# Altium PCB PCB3.PcbDoc (part 3 of 4)
Units mm, origin at the board's own origin, x right, y up, seen from the top; angles counter-clockwise.
Board outline 130 x 71 mm, 4 copper layers (Top Layer, Mid Layer 1, Mid Layer 2, Bottom Layer), stack 1.57 mm thick; 325 components, 359 nets, 1545 pads, 1046 vias.
Unrouted connection lines stored in the file: 158.
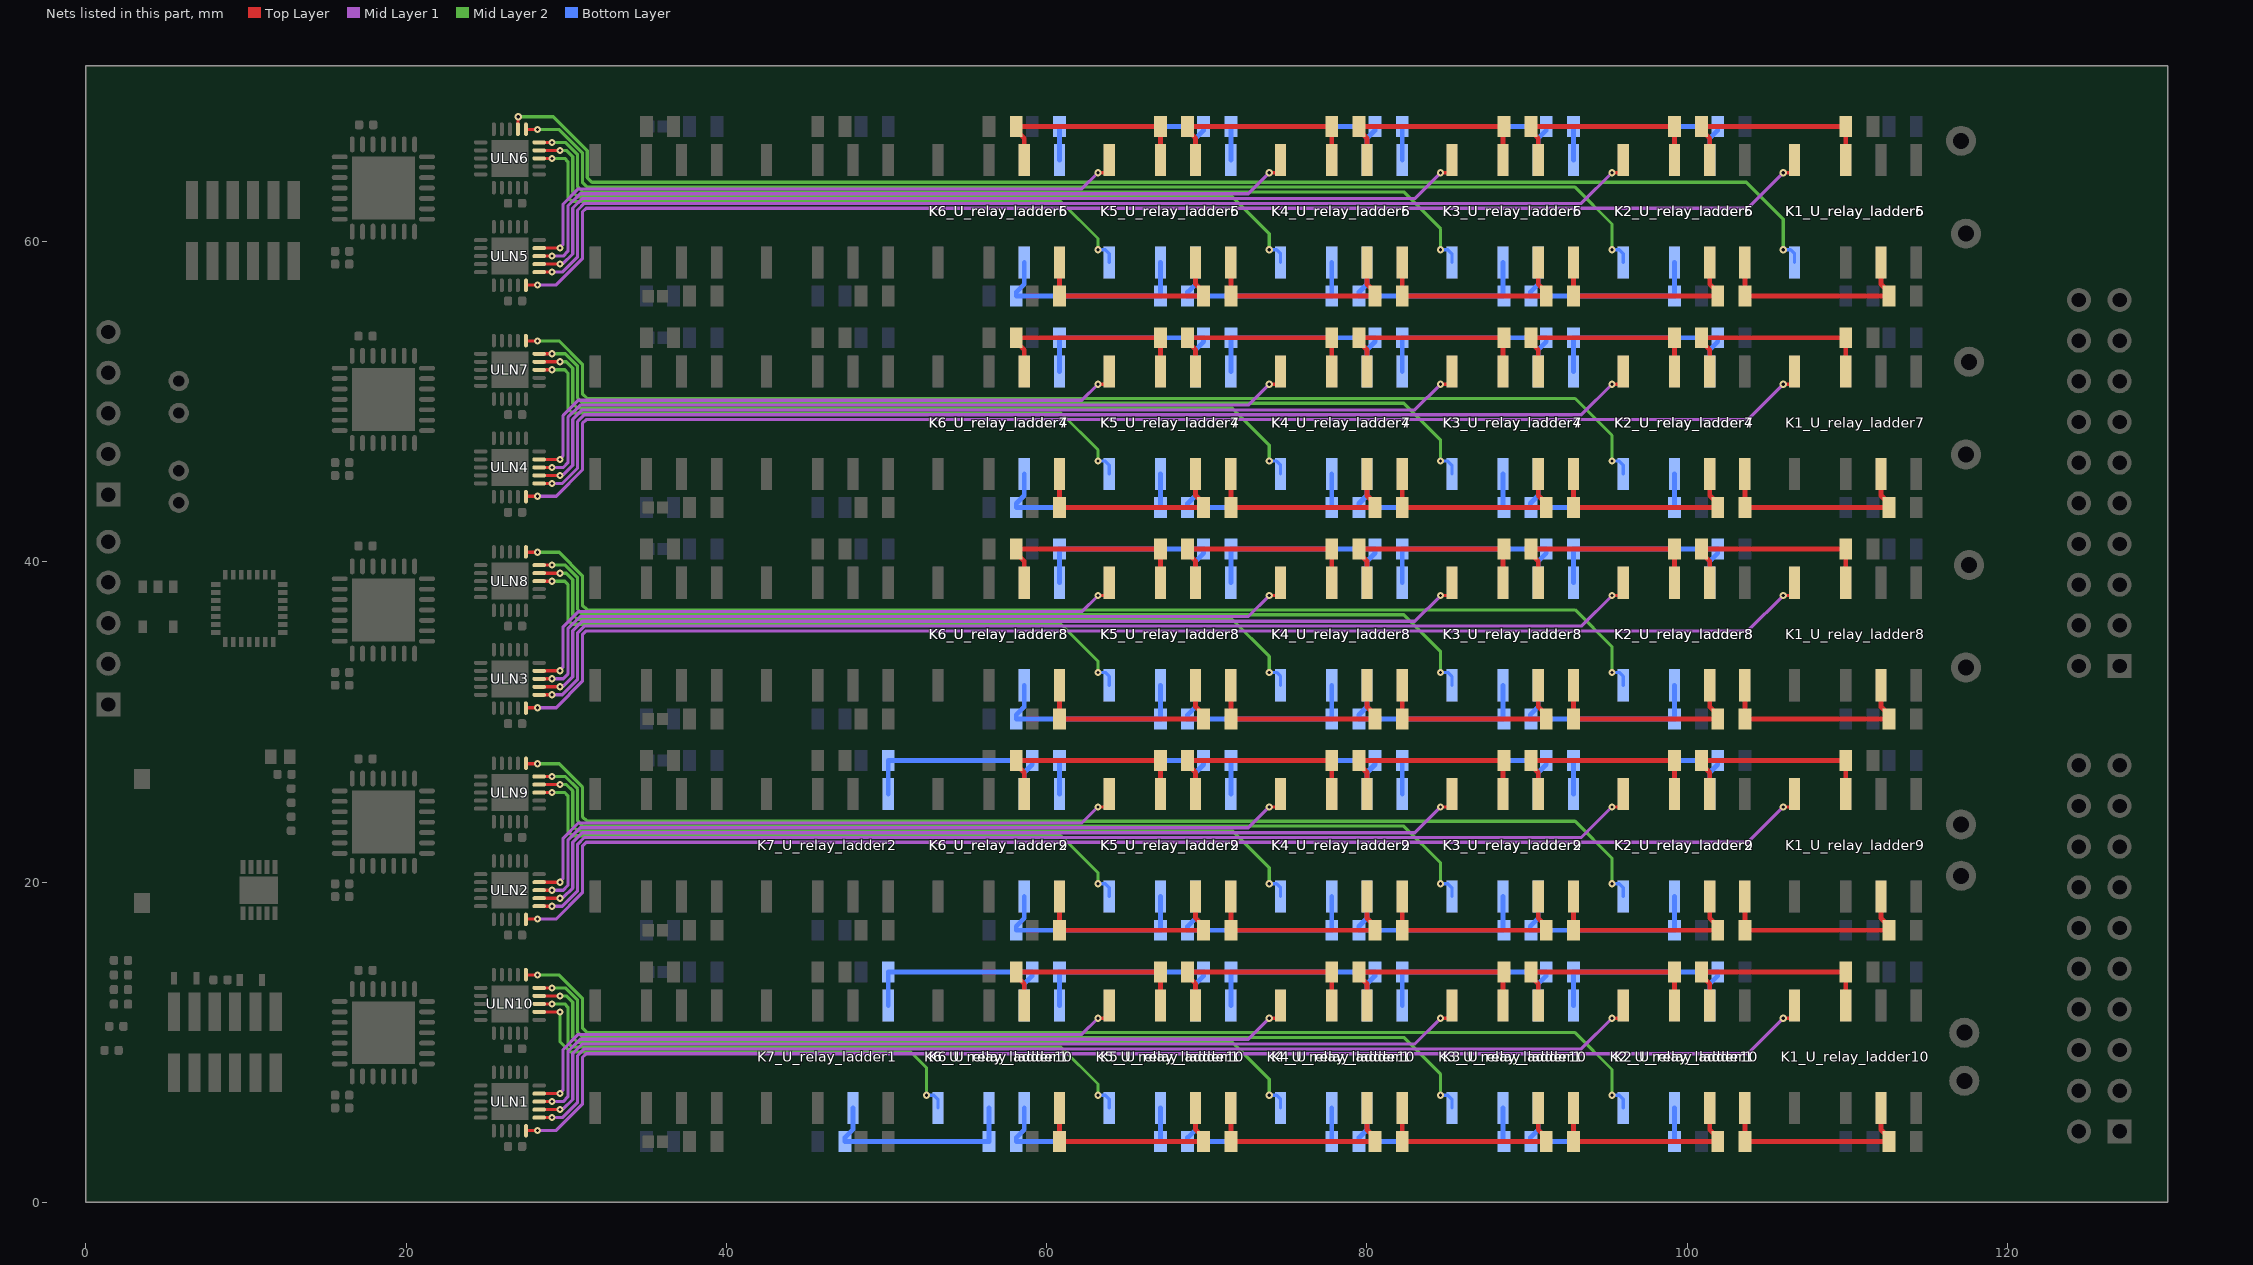
[diagram p5: the nets of this part, all layers, seen from the top]

## Via types
v1: diameter 0.45, hole 0.2, Top Layer to Bottom Layer, 944 vias
v2: diameter 0.5, hole 0.2, Top Layer to Bottom Layer, 85 vias
v3: diameter 0.5, hole 0.25, Top Layer to Bottom Layer, 10 vias
v4: diameter 0.8, hole 0.4, Top Layer to Bottom Layer, 5 vias
v5: diameter 5.5, hole 3, Top Layer to Bottom Layer, 2 vias

## Nets (pads, with @x,y where several pads share a name; then routed paths per layer and width w, separated by ;. In a path a pad name is that pad's centre, name@x,y a point inside that pad or via, vN(x,y) a via of type N, cw(c..) or ccw(c..) an arc to the next point about the centre after c; other vN are vias at no path point) (continued)
NetK1_U_relay_ladder5_8: K1_U_relay_ladder5.8 ULN6.17 | length 86.7
  Top Layer w0.2: ULN6.17@26.975,67.025 26.985,67.035 26.985,67.785 v1(27,67.8)
  Mid Layer 2 w0.2: v1(27,67.8) 29.18,67.8 31.306,65.673 31.306,64 31.597,63.71 103.694,63.71 106,61.404 v1(106,59.5)
  Bottom Layer w0.2: v1(106,59.5) 106.453,59.5 106.703,59.25 K1_U_relay_ladder5.8@106.703,58.7
NetK1_U_relay_ladder6_3: K1_U_relay_ladder6.3 K2_U_relay_ladder6.4 R5_U_relay_ladder6.2 R6_U_relay_ladder6.1 | length 13.4
  Top Layer w0.3: K2_U_relay_ladder6.4@103.597,58.7 103.599,58.698 R6_U_relay_ladder6.1@103.6,56.6 R6_U_relay_ladder6.1@103.6,56.6 112.6,56.6 112.6,56.85 112.1,57.35 K1_U_relay_ladder6.3@112.1,58.7
NetK1_U_relay_ladder6_7: K1_U_relay_ladder6.7 K2_U_relay_ladder6.6 R13_U_relay_ladder6.2 R14_U_relay_ladder6.1 | length 13.4
  Top Layer w0.3: K2_U_relay_ladder6.6@101.4,65.1 101.4,66.45 100.9,66.95 R14_U_relay_ladder6.1@100.9,67.2 109.9,67.2 109.902,67.198 109.902,65.102 K1_U_relay_ladder6.7@109.903,65.1
NetK1_U_relay_ladder6_8: K1_U_relay_ladder6.8 ULN5.10 | length 84.5
  Top Layer w0.2: ULN5.10@27.475,57.275 27.475,57.277 27.498,57.3 v1(28.2,57.3) ; v1(106,64.3) 106.453,64.3 106.703,64.55 K1_U_relay_ladder6.8@106.703,65.1
  Mid Layer 1 w0.2: v1(28.2,57.3) 29.366,57.3 31.005,58.939 31.005,61.854 31.241,62.09 103.79,62.09 v1(106,64.3)
NetK1_U_relay_ladder7_3: K1_U_relay_ladder7.3 K2_U_relay_ladder7.4 R5_U_relay_ladder7.2 R6_U_relay_ladder7.1 | length 13.4
  Top Layer w0.3: K2_U_relay_ladder7.4@103.597,45.5 103.599,45.498 R6_U_relay_ladder7.1@103.6,43.4 R6_U_relay_ladder7.1@103.6,43.4 112.6,43.4 112.6,43.65 112.1,44.15 K1_U_relay_ladder7.3@112.1,45.5
NetK1_U_relay_ladder7_7: K1_U_relay_ladder7.7 K2_U_relay_ladder7.6 R13_U_relay_ladder7.2 R14_U_relay_ladder7.1 | length 13.4
  Top Layer w0.3: K2_U_relay_ladder7.6@101.4,51.9 101.4,53.25 100.9,53.75 R14_U_relay_ladder7.1@100.9,54 109.9,54 109.902,53.998 109.902,51.902 K1_U_relay_ladder7.7@109.903,51.9
NetK1_U_relay_ladder7_8: K1_U_relay_ladder7.8 ULN4.10 | length 84.5
  Top Layer w0.2: ULN4.10@27.475,44.075 ULN4.10@27.475,44.075 27.498,44.1 v1(28.2,44.1) ; v1(106,51.1) 106.453,51.1 106.703,51.35 K1_U_relay_ladder7.8@106.703,51.9
  Mid Layer 1 w0.2: v1(28.2,44.1) 29.366,44.1 31.005,45.739 31.005,48.654 31.241,48.89 103.79,48.89 v1(106,51.1)
NetK1_U_relay_ladder8_3: K1_U_relay_ladder8.3 K2_U_relay_ladder8.4 R5_U_relay_ladder8.2 R6_U_relay_ladder8.1 | length 13.4
  Top Layer w0.3: K2_U_relay_ladder8.4@103.597,32.3 103.599,32.298 103.599,30.202 R6_U_relay_ladder8.1@103.6,30.2 112.6,30.2 112.6,30.45 112.1,30.95 K1_U_relay_ladder8.3@112.1,32.3
NetK1_U_relay_ladder8_7: K1_U_relay_ladder8.7 K2_U_relay_ladder8.6 R13_U_relay_ladder8.2 R14_U_relay_ladder8.1 | length 13.4
  Top Layer w0.3: K2_U_relay_ladder8.6@101.4,38.7 101.4,40.05 100.9,40.55 R14_U_relay_ladder8.1@100.9,40.8 109.9,40.8 109.902,40.798 109.902,38.702 K1_U_relay_ladder8.7@109.903,38.7
NetK1_U_relay_ladder8_8: K1_U_relay_ladder8.8 ULN3.10 | length 84.5
  Top Layer w0.2: ULN3.10@27.475,30.875 ULN3.10@27.475,30.875 27.498,30.9 v1(28.2,30.9) ; v1(106,37.9) 106.453,37.9 106.703,38.15 K1_U_relay_ladder8.8@106.703,38.7
  Mid Layer 1 w0.2: v1(28.2,30.9) 29.366,30.9 31.005,32.539 31.005,35.454 31.241,35.69 103.79,35.69 v1(106,37.9)
NetK1_U_relay_ladder9_3: K1_U_relay_ladder9.3 K2_U_relay_ladder9.4 R5_U_relay_ladder9.2 R6_U_relay_ladder9.1 | length 13.4
  Top Layer w0.3: K2_U_relay_ladder9.4@103.597,19.1 103.599,19.098 103.599,17.002 R6_U_relay_ladder9.1@103.6,17 112.6,17 112.6,17.25 112.1,17.75 K1_U_relay_ladder9.3@112.1,19.1
NetK1_U_relay_ladder9_7: K1_U_relay_ladder9.7 K2_U_relay_ladder9.6 R13_U_relay_ladder9.2 R14_U_relay_ladder9.1 | length 13.4
  Top Layer w0.3: K2_U_relay_ladder9.6@101.4,25.5 101.4,26.85 100.9,27.35 R14_U_relay_ladder9.1@100.9,27.6 109.9,27.6 109.902,27.598 109.902,25.502 K1_U_relay_ladder9.7@109.903,25.5
NetK1_U_relay_ladder9_8: K1_U_relay_ladder9.8 ULN2.10 | length 84.5
  Top Layer w0.2: ULN2.10@27.475,17.675 27.475,17.677 27.498,17.7 v1(28.2,17.7) ; v1(106,24.7) 106.453,24.7 106.703,24.95 K1_U_relay_ladder9.8@106.703,25.5
  Mid Layer 1 w0.2: v1(28.2,17.7) 29.366,17.7 31.005,19.339 31.005,22.254 31.241,22.49 103.79,22.49 v1(106,24.7)
NetK1_U_relay_ladder10_3: K1_U_relay_ladder10.3 K2_U_relay_ladder10.4 R5_U_relay_ladder10.2 R6_U_relay_ladder10.1 | length 13.4
  Top Layer w0.3: K2_U_relay_ladder10.4@103.597,5.9 103.599,5.898 103.599,3.802 R6_U_relay_ladder10.1@103.6,3.8 112.6,3.8 112.6,4.05 112.1,4.55 K1_U_relay_ladder10.3@112.1,5.9
NetK1_U_relay_ladder10_7: K1_U_relay_ladder10.7 K2_U_relay_ladder10.6 R13_U_relay_ladder10.2 R14_U_relay_ladder10.1 | length 13.4
  Top Layer w0.3: K2_U_relay_ladder10.6@101.4,12.3 101.4,13.65 100.9,14.15 100.9,14.4 109.9,14.4 109.902,14.398 109.902,12.302 K1_U_relay_ladder10.7@109.903,12.3
NetK1_U_relay_ladder10_8: K1_U_relay_ladder10.8 ULN1.10 | length 84.5
  Top Layer w0.2: ULN1.10@27.475,4.475 27.475,4.477 27.498,4.5 v1(28.2,4.5) ; v1(106,11.5) 106.453,11.5 106.703,11.75 K1_U_relay_ladder10.8@106.703,12.3
  Mid Layer 1 w0.2: v1(28.2,4.5) 29.366,4.5 31.005,6.139 31.005,9.054 31.241,9.29 103.79,9.29 v1(106,11.5)
NetK2_U_relay_ladder1_3: K2_U_relay_ladder1.3 K3_U_relay_ladder1.4 R6_U_relay_ladder1.2 R7_U_relay_ladder1.1 | length 13.4
  Bottom Layer w0.3: K3_U_relay_ladder1.4@92.897,12.3 K3_U_relay_ladder1.4@92.897,12.3 92.899,14.398 92.9,14.4 101.9,14.4 101.9,14.15 101.4,13.65 K2_U_relay_ladder1.3@101.4,12.3
NetK2_U_relay_ladder1_7: K2_U_relay_ladder1.7 K3_U_relay_ladder1.6 R14_U_relay_ladder1.2 R15_U_relay_ladder1.1 | length 13.4
  Bottom Layer w0.3: K3_U_relay_ladder1.6@90.7,5.9 90.7,4.55 90.2,4.05 90.2,3.8 R14_U_relay_ladder1.2@99.2,3.8 99.202,3.801 99.202,5.898 K2_U_relay_ladder1.7@99.203,5.9
NetK2_U_relay_ladder1_8: K2_U_relay_ladder1.8 ULN10.16 | length 74.3
  Top Layer w0.2: ULN10.16@27.475,14.225 27.475,14.223 27.498,14.2 v1(28.2,14.2)
  Mid Layer 2 w0.2: v1(28.2,14.2) 29.553,14.2 31.005,12.748 31.005,10.9 31.297,10.608 92.994,10.608 95.3,8.302 v1(95.3,6.7)
  Bottom Layer w0.2: v1(95.3,6.7) 95.753,6.7 96.003,6.45 K2_U_relay_ladder1.8@96.003,5.9
NetK2_U_relay_ladder2_3: K2_U_relay_ladder2.3 K3_U_relay_ladder2.4 R6_U_relay_ladder2.2 R7_U_relay_ladder2.1 | length 13.4
  Bottom Layer w0.3: K3_U_relay_ladder2.4@92.897,25.5 K3_U_relay_ladder2.4@92.897,25.5 92.899,27.598 R7_U_relay_ladder2.1@92.9,27.6 R6_U_relay_ladder2.2@101.9,27.6 101.9,27.35 101.4,26.85 K2_U_relay_ladder2.3@101.4,25.5
NetK2_U_relay_ladder2_7: K2_U_relay_ladder2.7 K3_U_relay_ladder2.6 R14_U_relay_ladder2.2 R15_U_relay_ladder2.1 | length 13.4
  Bottom Layer w0.3: K3_U_relay_ladder2.6@90.7,19.1 90.7,17.75 90.2,17.25 90.2,17 R14_U_relay_ladder2.2@99.2,17 99.202,17.001 99.202,19.098 K2_U_relay_ladder2.7@99.203,19.1
NetK2_U_relay_ladder2_8: K2_U_relay_ladder2.8 ULN9.16 | length 74.3
  Top Layer w0.2: ULN9.16@27.475,27.425 ULN9.16@27.475,27.425 27.498,27.4 v1(28.2,27.4)
  Mid Layer 2 w0.2: v1(28.2,27.4) 29.553,27.4 31.005,25.948 31.005,24.1 31.297,23.808 92.994,23.808 95.3,21.502 v1(95.3,19.9)
  Bottom Layer w0.2: v1(95.3,19.9) 95.753,19.9 96.003,19.65 K2_U_relay_ladder2.8@96.003,19.1
NetK2_U_relay_ladder3_3: K2_U_relay_ladder3.3 K3_U_relay_ladder3.4 R6_U_relay_ladder3.2 R7_U_relay_ladder3.1 | length 13.4
  Bottom Layer w0.3: K3_U_relay_ladder3.4@92.898,38.7 K3_U_relay_ladder3.4@92.897,38.7 92.899,40.798 R7_U_relay_ladder3.1@92.9,40.8 R6_U_relay_ladder3.2@101.9,40.8 101.9,40.55 101.4,40.05 K2_U_relay_ladder3.3@101.4,38.7
NetK2_U_relay_ladder3_7: K2_U_relay_ladder3.7 K3_U_relay_ladder3.6 R14_U_relay_ladder3.2 R15_U_relay_ladder3.1 | length 13.4
  Bottom Layer w0.3: K3_U_relay_ladder3.6@90.7,32.3 90.7,30.95 90.2,30.45 90.2,30.2 R14_U_relay_ladder3.2@99.2,30.2 99.202,30.201 99.202,32.298 K2_U_relay_ladder3.7@99.203,32.3
NetK2_U_relay_ladder3_8: K2_U_relay_ladder3.8 ULN8.16 | length 74.3
  Top Layer w0.2: ULN8.16@27.475,40.625 ULN8.16@27.475,40.625 27.498,40.6 v1(28.2,40.6)
  Mid Layer 2 w0.2: v1(28.2,40.6) 29.553,40.6 31.005,39.148 31.005,37.3 31.297,37.008 92.994,37.008 95.3,34.702 v1(95.3,33.1)
  Bottom Layer w0.2: v1(95.3,33.1) 95.753,33.1 96.003,32.85 K2_U_relay_ladder3.8@96.003,32.3
NetK2_U_relay_ladder4_3: K2_U_relay_ladder4.3 K3_U_relay_ladder4.4 R6_U_relay_ladder4.2 R7_U_relay_ladder4.1 | length 13.4
  Bottom Layer w0.3: K3_U_relay_ladder4.4@92.897,51.9 92.899,51.901 92.899,53.998 R7_U_relay_ladder4.1@92.9,54 R6_U_relay_ladder4.2@101.9,54 101.9,53.75 101.4,53.25 K2_U_relay_ladder4.3@101.4,51.9
NetK2_U_relay_ladder4_7: K2_U_relay_ladder4.7 K3_U_relay_ladder4.6 R14_U_relay_ladder4.2 R15_U_relay_ladder4.1 | length 13.4
  Bottom Layer w0.3: K3_U_relay_ladder4.6@90.7,45.5 90.7,44.15 90.2,43.65 90.2,43.4 R14_U_relay_ladder4.2@99.2,43.4 99.202,43.401 K2_U_relay_ladder4.7@99.203,45.5 K2_U_relay_ladder4.7@99.203,45.5
NetK2_U_relay_ladder4_8: K2_U_relay_ladder4.8 ULN7.16 | length 74.3
  Top Layer w0.2: ULN7.16@27.475,53.825 27.475,53.823 27.498,53.8 v1(28.2,53.8)
  Mid Layer 2 w0.2: v1(28.2,53.8) 29.553,53.8 31.005,52.348 31.005,50.5 31.297,50.208 92.994,50.208 95.3,47.902 v1(95.3,46.3)
  Bottom Layer w0.2: v1(95.3,46.3) 95.753,46.3 96.003,46.05 K2_U_relay_ladder4.8@96.003,45.5
NetK2_U_relay_ladder5_3: K2_U_relay_ladder5.3 K3_U_relay_ladder5.4 R6_U_relay_ladder5.2 R7_U_relay_ladder5.1 | length 13.4
  Bottom Layer w0.3: K3_U_relay_ladder5.4@92.897,65.1 92.899,65.101 92.899,67.198 R7_U_relay_ladder5.1@92.9,67.2 R6_U_relay_ladder5.2@101.9,67.2 101.9,66.95 101.4,66.45 K2_U_relay_ladder5.3@101.4,65.1
NetK2_U_relay_ladder5_7: K2_U_relay_ladder5.7 K3_U_relay_ladder5.6 R14_U_relay_ladder5.2 R15_U_relay_ladder5.1 | length 13.4
  Bottom Layer w0.3: K3_U_relay_ladder5.6@90.7,58.7 90.7,57.35 90.2,56.85 90.2,56.6 R14_U_relay_ladder5.2@99.2,56.6 99.202,56.601 K2_U_relay_ladder5.7@99.203,58.7 K2_U_relay_ladder5.7@99.203,58.7
NetK2_U_relay_ladder5_8: K2_U_relay_ladder5.8 ULN6.16 | length 74.3
  Top Layer w0.2: ULN6.16@27.475,67.025 27.475,67.023 27.498,67 v1(28.2,67)
  Mid Layer 2 w0.2: v1(28.2,67) 29.553,67 31.005,65.548 31.005,63.7 31.297,63.408 92.994,63.408 95.3,61.102 v1(95.3,59.5)
  Bottom Layer w0.2: v1(95.3,59.5) 95.753,59.5 96.003,59.25 K2_U_relay_ladder5.8@96.003,58.7
NetK2_U_relay_ladder6_3: K2_U_relay_ladder6.3 K3_U_relay_ladder6.4 R6_U_relay_ladder6.2 R7_U_relay_ladder6.1 | length 13.4
  Top Layer w0.3: K3_U_relay_ladder6.4@92.897,58.7 K3_U_relay_ladder6.4@92.897,58.7 92.899,56.602 R7_U_relay_ladder6.1@92.9,56.6 R6_U_relay_ladder6.2@101.9,56.6 101.9,56.85 101.4,57.35 K2_U_relay_ladder6.3@101.4,58.7
NetK2_U_relay_ladder6_7: K2_U_relay_ladder6.7 K3_U_relay_ladder6.6 R14_U_relay_ladder6.2 R15_U_relay_ladder6.1 | length 13.4
  Top Layer w0.3: K3_U_relay_ladder6.6@90.7,65.1 90.7,66.45 90.2,66.95 90.2,67.2 R14_U_relay_ladder6.2@99.2,67.2 99.202,67.198 99.202,65.102 K2_U_relay_ladder6.7@99.203,65.1
NetK2_U_relay_ladder6_8: K2_U_relay_ladder6.8 ULN5.11 | length 72.6
  Top Layer w0.2: ULN5.11@28.3,58.1 v1(29.1,58.1) ; v1(95.3,64.3) 95.753,64.3 96.003,64.55 K2_U_relay_ladder6.8@96.003,65.1
  Mid Layer 1 w0.2: v1(29.1,58.1) 29.739,58.1 30.703,59.064 30.703,61.979 31.116,62.392 93.392,62.392 v1(95.3,64.3)
NetK2_U_relay_ladder7_3: K2_U_relay_ladder7.3 K3_U_relay_ladder7.4 R6_U_relay_ladder7.2 R7_U_relay_ladder7.1 | length 13.4
  Top Layer w0.3: K3_U_relay_ladder7.4@92.897,45.5 K3_U_relay_ladder7.4@92.897,45.5 92.899,43.402 R7_U_relay_ladder7.1@92.9,43.4 R6_U_relay_ladder7.2@101.9,43.4 101.9,43.65 101.4,44.15 K2_U_relay_ladder7.3@101.4,45.5
NetK2_U_relay_ladder7_7: K2_U_relay_ladder7.7 K3_U_relay_ladder7.6 R14_U_relay_ladder7.2 R15_U_relay_ladder7.1 | length 13.4
  Top Layer w0.3: K3_U_relay_ladder7.6@90.7,51.9 90.7,53.25 90.2,53.75 90.2,54 R14_U_relay_ladder7.2@99.2,54 99.202,53.998 99.202,51.902 K2_U_relay_ladder7.7@99.203,51.9
NetK2_U_relay_ladder7_8: K2_U_relay_ladder7.8 ULN4.11 | length 72.6
  Top Layer w0.2: ULN4.11@28.3,44.9 v1(29.1,44.9) ; v1(95.3,51.1) 95.753,51.1 96.003,51.35 K2_U_relay_ladder7.8@96.003,51.9
  Mid Layer 1 w0.2: v1(29.1,44.9) 29.739,44.9 30.703,45.864 30.703,48.779 31.116,49.192 93.392,49.192 v1(95.3,51.1)
NetK2_U_relay_ladder8_3: K2_U_relay_ladder8.3 K3_U_relay_ladder8.4 R6_U_relay_ladder8.2 R7_U_relay_ladder8.1 | length 13.4
  Top Layer w0.3: K3_U_relay_ladder8.4@92.897,32.3 92.899,32.298 92.899,30.202 R7_U_relay_ladder8.1@92.9,30.2 R6_U_relay_ladder8.2@101.9,30.2 101.9,30.45 101.4,30.95 K2_U_relay_ladder8.3@101.4,32.3
NetK2_U_relay_ladder8_7: K2_U_relay_ladder8.7 K3_U_relay_ladder8.6 R14_U_relay_ladder8.2 R15_U_relay_ladder8.1 | length 13.4
  Top Layer w0.3: K3_U_relay_ladder8.6@90.7,38.7 90.7,40.05 90.2,40.55 90.2,40.8 R14_U_relay_ladder8.2@99.2,40.8 99.202,40.798 K2_U_relay_ladder8.7@99.203,38.7 K2_U_relay_ladder8.7@99.203,38.7
NetK2_U_relay_ladder8_8: K2_U_relay_ladder8.8 ULN3.11 | length 72.6
  Top Layer w0.2: ULN3.11@28.3,31.7 v1(29.1,31.7) ; v1(95.3,37.9) 95.753,37.9 96.003,38.15 K2_U_relay_ladder8.8@96.003,38.7
  Mid Layer 1 w0.2: v1(29.1,31.7) 29.739,31.7 30.703,32.664 30.703,35.579 31.116,35.992 93.392,35.992 v1(95.3,37.9)
NetK2_U_relay_ladder9_3: K2_U_relay_ladder9.3 K3_U_relay_ladder9.4 R6_U_relay_ladder9.2 R7_U_relay_ladder9.1 | length 13.4
  Top Layer w0.3: K3_U_relay_ladder9.4@92.897,19.1 92.899,19.098 92.899,17.002 R7_U_relay_ladder9.1@92.9,17 R6_U_relay_ladder9.2@101.9,17 101.9,17.25 101.4,17.75 K2_U_relay_ladder9.3@101.4,19.1
NetK2_U_relay_ladder9_7: K2_U_relay_ladder9.7 K3_U_relay_ladder9.6 R14_U_relay_ladder9.2 R15_U_relay_ladder9.1 | length 13.4
  Top Layer w0.3: K3_U_relay_ladder9.6@90.7,25.5 90.7,26.85 90.2,27.35 90.2,27.6 R14_U_relay_ladder9.2@99.2,27.6 99.202,27.598 K2_U_relay_ladder9.7@99.203,25.5 K2_U_relay_ladder9.7@99.203,25.5
NetK2_U_relay_ladder9_8: K2_U_relay_ladder9.8 ULN2.11 | length 72.6
  Top Layer w0.2: ULN2.11@28.3,18.5 v1(29.1,18.5) ; v1(95.3,24.7) 95.753,24.7 96.003,24.95 K2_U_relay_ladder9.8@96.003,25.5
  Mid Layer 1 w0.2: v1(29.1,18.5) 29.739,18.5 30.703,19.464 30.703,22.379 31.116,22.792 93.392,22.792 v1(95.3,24.7)
NetK2_U_relay_ladder10_3: K2_U_relay_ladder10.3 K3_U_relay_ladder10.4 R6_U_relay_ladder10.2 R7_U_relay_ladder10.1 | length 13.4
  Top Layer w0.3: K3_U_relay_ladder10.4@92.897,5.9 92.899,5.898 92.899,3.802 R7_U_relay_ladder10.1@92.9,3.8 R6_U_relay_ladder10.2@101.9,3.8 101.9,4.05 101.4,4.55 K2_U_relay_ladder10.3@101.4,5.9
NetK2_U_relay_ladder10_7: K2_U_relay_ladder10.7 K3_U_relay_ladder10.6 R14_U_relay_ladder10.2 R15_U_relay_ladder10.1 | length 13.4
  Top Layer w0.3: K3_U_relay_ladder10.6@90.7,12.3 90.7,13.65 90.2,14.15 90.2,14.4 99.2,14.4 99.202,14.398 K2_U_relay_ladder10.7@99.203,12.3 K2_U_relay_ladder10.7@99.203,12.3
NetK2_U_relay_ladder10_8: K2_U_relay_ladder10.8 ULN1.11 | length 72.6
  Top Layer w0.2: ULN1.11@28.3,5.3 v1(29.1,5.3) ; v1(95.3,11.5) 95.753,11.5 96.003,11.75 K2_U_relay_ladder10.8@96.003,12.3
  Mid Layer 1 w0.2: v1(29.1,5.3) 29.739,5.3 30.703,6.264 30.703,9.179 31.116,9.592 93.392,9.592 v1(95.3,11.5)
NetK3_U_relay_ladder1_3: K3_U_relay_ladder1.3 K4_U_relay_ladder1.4 R7_U_relay_ladder1.2 R8_U_relay_ladder1.1 | length 13.4
  Bottom Layer w0.3: K4_U_relay_ladder1.4@82.197,12.3 82.199,12.301 82.199,14.398 82.2,14.4 91.2,14.4 91.2,14.15 90.7,13.65 K3_U_relay_ladder1.3@90.7,12.3
NetK3_U_relay_ladder1_7: K3_U_relay_ladder1.7 K4_U_relay_ladder1.6 R15_U_relay_ladder1.2 R16_U_relay_ladder1.1 | length 13.4
  Bottom Layer w0.3: K4_U_relay_ladder1.6@80,5.9 80,4.55 79.5,4.05 R16_U_relay_ladder1.1@79.5,3.8 88.5,3.8 88.502,3.801 88.502,5.898 K3_U_relay_ladder1.7@88.503,5.9
NetK3_U_relay_ladder1_8: K3_U_relay_ladder1.8 ULN10.15 | length 62.4
  Top Layer w0.2: ULN10.15@28.3,13.4 v1(29.1,13.4)
  Mid Layer 2 w0.2: v1(29.1,13.4) 29.927,13.4 30.703,12.623 30.703,10.629 31.026,10.306 82.294,10.306 84.6,8 v1(84.6,6.7)
  Bottom Layer w0.2: v1(84.6,6.7) 85.053,6.7 85.303,6.45 K3_U_relay_ladder1.8@85.303,5.9
NetK3_U_relay_ladder2_3: K3_U_relay_ladder2.3 K4_U_relay_ladder2.4 R7_U_relay_ladder2.2 R8_U_relay_ladder2.1 | length 13.4
  Bottom Layer w0.3: K4_U_relay_ladder2.4@82.197,25.5 82.199,25.501 R8_U_relay_ladder2.1@82.2,27.6 R8_U_relay_ladder2.1@82.2,27.6 R7_U_relay_ladder2.2@91.2,27.6 91.2,27.35 90.7,26.85 K3_U_relay_ladder2.3@90.7,25.5
NetK3_U_relay_ladder2_7: K3_U_relay_ladder2.7 K4_U_relay_ladder2.6 R15_U_relay_ladder2.2 R16_U_relay_ladder2.1 | length 13.4
  Bottom Layer w0.3: K4_U_relay_ladder2.6@80,19.1 80,17.75 79.5,17.25 R16_U_relay_ladder2.1@79.5,17 88.5,17 88.502,17.001 88.502,19.098 K3_U_relay_ladder2.7@88.503,19.1
NetK3_U_relay_ladder2_8: K3_U_relay_ladder2.8 ULN9.15 | length 62.4
  Top Layer w0.2: ULN9.15@28.3,26.6 v1(29.1,26.6)
  Mid Layer 2 w0.2: v1(29.1,26.6) 29.927,26.6 30.703,25.823 30.703,23.829 31.026,23.506 82.294,23.506 84.6,21.2 v1(84.6,19.9)
  Bottom Layer w0.2: v1(84.6,19.9) 85.053,19.9 85.303,19.65 K3_U_relay_ladder2.8@85.303,19.1
NetK3_U_relay_ladder3_3: K3_U_relay_ladder3.3 K4_U_relay_ladder3.4 R7_U_relay_ladder3.2 R8_U_relay_ladder3.1 | length 13.4
  Bottom Layer w0.3: K4_U_relay_ladder3.4@82.198,38.7 82.199,38.701 R8_U_relay_ladder3.1@82.2,40.8 R8_U_relay_ladder3.1@82.2,40.8 R7_U_relay_ladder3.2@91.2,40.8 91.2,40.55 90.7,40.05 K3_U_relay_ladder3.3@90.7,38.7
NetK3_U_relay_ladder3_7: K3_U_relay_ladder3.7 K4_U_relay_ladder3.6 R15_U_relay_ladder3.2 R16_U_relay_ladder3.1 | length 13.4
  Bottom Layer w0.3: K4_U_relay_ladder3.6@80,32.3 80,30.95 79.5,30.45 R16_U_relay_ladder3.1@79.5,30.2 88.5,30.2 88.502,30.201 88.502,32.298 K3_U_relay_ladder3.7@88.503,32.3
NetK3_U_relay_ladder3_8: K3_U_relay_ladder3.8 ULN8.15 | length 62.4
  Top Layer w0.2: ULN8.15@28.3,39.8 v1(29.1,39.8)
  Mid Layer 2 w0.2: v1(29.1,39.8) 29.927,39.8 30.703,39.023 30.703,37.029 31.026,36.706 82.294,36.706 84.6,34.4 v1(84.6,33.1)
  Bottom Layer w0.2: v1(84.6,33.1) 85.053,33.1 85.303,32.85 K3_U_relay_ladder3.8@85.303,32.3
NetK3_U_relay_ladder4_3: K3_U_relay_ladder4.3 K4_U_relay_ladder4.4 R7_U_relay_ladder4.2 R8_U_relay_ladder4.1 | length 13.4
  Bottom Layer w0.3: K4_U_relay_ladder4.4@82.197,51.9 82.199,51.901 82.199,53.998 R8_U_relay_ladder4.1@82.2,54 R7_U_relay_ladder4.2@91.2,54 91.2,53.75 90.7,53.25 K3_U_relay_ladder4.3@90.7,51.9
NetK3_U_relay_ladder4_7: K3_U_relay_ladder4.7 K4_U_relay_ladder4.6 R15_U_relay_ladder4.2 R16_U_relay_ladder4.1 | length 13.4
  Bottom Layer w0.3: K4_U_relay_ladder4.6@80,45.5 80,44.15 79.5,43.65 R16_U_relay_ladder4.1@79.5,43.4 88.5,43.4 88.502,43.401 88.502,45.498 K3_U_relay_ladder4.7@88.503,45.5
NetK3_U_relay_ladder4_8: K3_U_relay_ladder4.8 ULN7.15 | length 62.4
  Top Layer w0.2: ULN7.15@28.3,53 v1(29.1,53)
  Mid Layer 2 w0.2: v1(29.1,53) 29.927,53 30.703,52.223 30.703,50.229 31.026,49.906 82.294,49.906 84.6,47.6 v1(84.6,46.3)
  Bottom Layer w0.2: v1(84.6,46.3) 85.053,46.3 85.303,46.05 K3_U_relay_ladder4.8@85.303,45.5
NetK3_U_relay_ladder5_3: K3_U_relay_ladder5.3 K4_U_relay_ladder5.4 R7_U_relay_ladder5.2 R8_U_relay_ladder5.1 | length 13.4
  Bottom Layer w0.3: K4_U_relay_ladder5.4@82.197,65.1 82.199,65.101 82.199,67.198 R8_U_relay_ladder5.1@82.2,67.2 R7_U_relay_ladder5.2@91.2,67.2 91.2,66.95 90.7,66.45 K3_U_relay_ladder5.3@90.7,65.1
NetK3_U_relay_ladder5_7: K3_U_relay_ladder5.7 K4_U_relay_ladder5.6 R15_U_relay_ladder5.2 R16_U_relay_ladder5.1 | length 13.4
  Bottom Layer w0.3: K4_U_relay_ladder5.6@80,58.7 80,57.35 79.5,56.85 R16_U_relay_ladder5.1@79.5,56.6 88.5,56.6 88.502,56.601 88.502,58.698 K3_U_relay_ladder5.7@88.503,58.7
NetK3_U_relay_ladder5_8: K3_U_relay_ladder5.8 ULN6.15 | length 62.4
  Top Layer w0.2: ULN6.15@28.3,66.2 v1(29.1,66.2)
  Mid Layer 2 w0.2: v1(29.1,66.2) 29.927,66.2 30.703,65.423 30.703,63.429 31.026,63.106 82.294,63.106 84.6,60.8 v1(84.6,59.5)
  Bottom Layer w0.2: v1(84.6,59.5) 85.053,59.5 85.303,59.25 K3_U_relay_ladder5.8@85.303,58.7
NetK3_U_relay_ladder6_3: K3_U_relay_ladder6.3 K4_U_relay_ladder6.4 R7_U_relay_ladder6.2 R8_U_relay_ladder6.1 | length 13.4
  Top Layer w0.3: K4_U_relay_ladder6.4@82.197,58.7 82.199,58.698 R8_U_relay_ladder6.1@82.2,56.6 R8_U_relay_ladder6.1@82.2,56.6 R7_U_relay_ladder6.2@91.2,56.6 91.2,56.85 90.7,57.35 K3_U_relay_ladder6.3@90.7,58.7
NetK3_U_relay_ladder6_7: K3_U_relay_ladder6.7 K4_U_relay_ladder6.6 R15_U_relay_ladder6.2 R16_U_relay_ladder6.1 | length 13.4
  Top Layer w0.3: K4_U_relay_ladder6.6@80,65.1 80,66.45 79.5,66.95 R16_U_relay_ladder6.1@79.5,67.2 88.5,67.2 88.502,67.198 88.502,65.102 K3_U_relay_ladder6.7@88.503,65.1
NetK3_U_relay_ladder6_8: K3_U_relay_ladder6.8 ULN5.12 | length 61.7
  Top Layer w0.2: ULN5.12@28.3,58.6 v1(29.6,58.6) ; v1(84.6,64.3) 85.053,64.3 85.303,64.55 K3_U_relay_ladder6.8@85.303,65.1
  Mid Layer 1 w0.2: v1(29.6,58.6) 29.648,58.648 29.819,58.648 30.402,59.23 30.402,62.104 30.991,62.694 82.994,62.694 v1(84.6,64.3)
NetK3_U_relay_ladder7_3: K3_U_relay_ladder7.3 K4_U_relay_ladder7.4 R7_U_relay_ladder7.2 R8_U_relay_ladder7.1 | length 13.4
  Top Layer w0.3: K4_U_relay_ladder7.4@82.197,45.5 82.199,45.498 R8_U_relay_ladder7.1@82.2,43.4 R8_U_relay_ladder7.1@82.2,43.4 R7_U_relay_ladder7.2@91.2,43.4 91.2,43.65 90.7,44.15 K3_U_relay_ladder7.3@90.7,45.5
NetK3_U_relay_ladder7_7: K3_U_relay_ladder7.7 K4_U_relay_ladder7.6 R15_U_relay_ladder7.2 R16_U_relay_ladder7.1 | length 13.4
  Top Layer w0.3: K4_U_relay_ladder7.6@80,51.9 80,53.25 79.5,53.75 R16_U_relay_ladder7.1@79.5,54 88.5,54 88.502,53.998 88.502,51.902 K3_U_relay_ladder7.7@88.503,51.9
NetK3_U_relay_ladder7_8: K3_U_relay_ladder7.8 ULN4.12 | length 61.7
  Top Layer w0.2: ULN4.12@28.3,45.4 v1(29.6,45.4) ; v1(84.6,51.1) 85.053,51.1 85.303,51.35 K3_U_relay_ladder7.8@85.303,51.9
  Mid Layer 1 w0.2: v1(29.6,45.4) 29.648,45.448 29.819,45.448 30.402,46.03 30.402,48.904 30.991,49.494 82.994,49.494 v1(84.6,51.1)
NetK3_U_relay_ladder8_3: K3_U_relay_ladder8.3 K4_U_relay_ladder8.4 R7_U_relay_ladder8.2 R8_U_relay_ladder8.1 | length 13.4
  Top Layer w0.3: K4_U_relay_ladder8.4@82.197,32.3 82.199,32.298 82.199,30.202 R8_U_relay_ladder8.1@82.2,30.2 R7_U_relay_ladder8.2@91.2,30.2 91.2,30.45 90.7,30.95 K3_U_relay_ladder8.3@90.7,32.3
NetK3_U_relay_ladder8_7: K3_U_relay_ladder8.7 K4_U_relay_ladder8.6 R15_U_relay_ladder8.2 R16_U_relay_ladder8.1 | length 13.4
  Top Layer w0.3: K4_U_relay_ladder8.6@80,38.7 80,40.05 79.5,40.55 R16_U_relay_ladder8.1@79.5,40.8 88.5,40.8 88.502,40.798 88.502,38.702 K3_U_relay_ladder8.7@88.503,38.7
NetK3_U_relay_ladder8_8: K3_U_relay_ladder8.8 ULN3.12 | length 61.7
  Top Layer w0.2: ULN3.12@28.3,32.2 v1(29.6,32.2) ; v1(84.6,37.9) 85.053,37.9 85.303,38.15 K3_U_relay_ladder8.8@85.303,38.7
  Mid Layer 1 w0.2: v1(29.6,32.2) 29.648,32.248 29.819,32.248 30.402,32.83 30.402,35.704 30.991,36.294 82.994,36.294 v1(84.6,37.9)
NetK3_U_relay_ladder9_3: K3_U_relay_ladder9.3 K4_U_relay_ladder9.4 R7_U_relay_ladder9.2 R8_U_relay_ladder9.1 | length 13.4
  Top Layer w0.3: K4_U_relay_ladder9.4@82.197,19.1 82.199,19.098 82.199,17.002 R8_U_relay_ladder9.1@82.2,17 R7_U_relay_ladder9.2@91.2,17 91.2,17.25 90.7,17.75 K3_U_relay_ladder9.3@90.7,19.1
NetK3_U_relay_ladder9_7: K3_U_relay_ladder9.7 K4_U_relay_ladder9.6 R15_U_relay_ladder9.2 R16_U_relay_ladder9.1 | length 13.4
  Top Layer w0.3: K4_U_relay_ladder9.6@80,25.5 80,26.85 79.5,27.35 R16_U_relay_ladder9.1@79.5,27.6 88.5,27.6 88.502,27.598 88.502,25.502 K3_U_relay_ladder9.7@88.503,25.5
NetK3_U_relay_ladder9_8: K3_U_relay_ladder9.8 ULN2.12 | length 61.7
  Top Layer w0.2: ULN2.12@28.3,19 v1(29.6,19) ; v1(84.6,24.7) 85.053,24.7 85.303,24.95 K3_U_relay_ladder9.8@85.303,25.5
  Mid Layer 1 w0.2: v1(29.6,19) 29.648,19.048 29.819,19.048 30.402,19.63 30.402,22.504 30.991,23.094 82.994,23.094 v1(84.6,24.7)
NetK3_U_relay_ladder10_3: K3_U_relay_ladder10.3 K4_U_relay_ladder10.4 R7_U_relay_ladder10.2 R8_U_relay_ladder10.1 | length 13.4
  Top Layer w0.3: K4_U_relay_ladder10.4@82.197,5.9 82.199,5.898 82.199,3.802 R8_U_relay_ladder10.1@82.2,3.8 R7_U_relay_ladder10.2@91.2,3.8 91.2,4.05 90.7,4.55 K3_U_relay_ladder10.3@90.7,5.9
NetK3_U_relay_ladder10_7: K3_U_relay_ladder10.7 K4_U_relay_ladder10.6 R15_U_relay_ladder10.2 R16_U_relay_ladder10.1 | length 13.4
  Top Layer w0.3: K4_U_relay_ladder10.6@80,12.3 80,13.65 79.5,14.15 79.5,14.4 88.5,14.4 88.502,14.398 88.502,12.302 K3_U_relay_ladder10.7@88.503,12.3
NetK3_U_relay_ladder10_8: K3_U_relay_ladder10.8 ULN1.12 | length 61.7
  Top Layer w0.2: ULN1.12@28.3,5.8 v1(29.6,5.8) ; v1(84.6,11.5) 85.053,11.5 85.303,11.75 K3_U_relay_ladder10.8@85.303,12.3
  Mid Layer 1 w0.2: v1(29.6,5.8) 29.648,5.848 29.819,5.848 30.402,6.43 30.402,9.304 30.991,9.894 82.994,9.894 v1(84.6,11.5)
NetK4_U_relay_ladder1_3: K4_U_relay_ladder1.3 K5_U_relay_ladder1.4 R8_U_relay_ladder1.2 R9_U_relay_ladder1.1 | length 13.4
  Bottom Layer w0.3: K5_U_relay_ladder1.4@71.497,12.3 71.499,12.301 71.499,14.398 71.5,14.4 80.5,14.4 80.5,14.15 80,13.65 K4_U_relay_ladder1.3@80,12.3
NetK4_U_relay_ladder1_7: K4_U_relay_ladder1.7 K5_U_relay_ladder1.6 R16_U_relay_ladder1.2 R17_U_relay_ladder1.1 | length 13.4
  Bottom Layer w0.3: K5_U_relay_ladder1.6@69.3,5.9 69.3,4.55 68.8,4.05 68.8,3.8 R16_U_relay_ladder1.2@77.8,3.8 77.802,3.801 77.802,5.898 K4_U_relay_ladder1.7@77.803,5.9
NetK4_U_relay_ladder1_8: K4_U_relay_ladder1.8 ULN10.14 | length 51.4
  Top Layer w0.2: ULN10.14@28.3,12.9 v1(29.6,12.9)
  Mid Layer 2 w0.2: v1(29.6,12.9) 30,12.9 30.402,12.498 30.402,10.3 30.697,10.005 71.594,10.005 73.9,7.699 v1(73.9,6.7)
  Bottom Layer w0.2: v1(73.9,6.7) 74.353,6.7 74.603,6.45 K4_U_relay_ladder1.8@74.603,5.9
NetK4_U_relay_ladder2_3: K4_U_relay_ladder2.3 K5_U_relay_ladder2.4 R8_U_relay_ladder2.2 R9_U_relay_ladder2.1 | length 13.4
  Bottom Layer w0.3: K5_U_relay_ladder2.4@71.497,25.5 71.499,25.501 R9_U_relay_ladder2.1@71.5,27.6 71.5,27.6 R8_U_relay_ladder2.2@80.5,27.6 80.5,27.35 80,26.85 K4_U_relay_ladder2.3@80,25.5
NetK4_U_relay_ladder2_7: K4_U_relay_ladder2.7 K5_U_relay_ladder2.6 R16_U_relay_ladder2.2 R17_U_relay_ladder2.1 | length 13.4
  Bottom Layer w0.3: K5_U_relay_ladder2.6@69.3,19.1 69.3,17.75 68.8,17.25 68.8,17 R16_U_relay_ladder2.2@77.8,17 77.802,17.001 77.802,19.098 K4_U_relay_ladder2.7@77.803,19.1
NetK4_U_relay_ladder2_8: K4_U_relay_ladder2.8 ULN9.14 | length 51.4
  Top Layer w0.2: ULN9.14@28.3,26.1 v1(29.6,26.1)
  Mid Layer 2 w0.2: v1(29.6,26.1) 30,26.1 30.402,25.698 30.402,23.5 30.697,23.205 71.594,23.205 73.9,20.899 v1(73.9,19.9)
  Bottom Layer w0.2: v1(73.9,19.9) 74.353,19.9 74.603,19.65 K4_U_relay_ladder2.8@74.603,19.1
NetK4_U_relay_ladder3_3: K4_U_relay_ladder3.3 K5_U_relay_ladder3.4 R8_U_relay_ladder3.2 R9_U_relay_ladder3.1 | length 13.4
  Bottom Layer w0.3: K5_U_relay_ladder3.4@71.498,38.7 71.499,38.701 R9_U_relay_ladder3.1@71.5,40.8 71.5,40.8 R8_U_relay_ladder3.2@80.5,40.8 80.5,40.55 80,40.05 K4_U_relay_ladder3.3@80,38.7
NetK4_U_relay_ladder3_7: K4_U_relay_ladder3.7 K5_U_relay_ladder3.6 R16_U_relay_ladder3.2 R17_U_relay_ladder3.1 | length 13.4
  Bottom Layer w0.3: K5_U_relay_ladder3.6@69.3,32.3 69.3,30.95 68.8,30.45 68.8,30.2 R16_U_relay_ladder3.2@77.8,30.2 77.802,30.201 77.802,32.298 K4_U_relay_ladder3.7@77.803,32.3
NetK4_U_relay_ladder3_8: K4_U_relay_ladder3.8 ULN8.14 | length 51.4
  Top Layer w0.2: ULN8.14@28.3,39.3 v1(29.6,39.3)
  Mid Layer 2 w0.2: v1(29.6,39.3) 30,39.3 30.402,38.898 30.402,36.7 30.697,36.405 71.594,36.405 73.9,34.099 v1(73.9,33.1)
  Bottom Layer w0.2: v1(73.9,33.1) 74.353,33.1 74.603,32.85 K4_U_relay_ladder3.8@74.603,32.3
NetK4_U_relay_ladder4_3: K4_U_relay_ladder4.3 K5_U_relay_ladder4.4 R8_U_relay_ladder4.2 R9_U_relay_ladder4.1 | length 13.4
  Bottom Layer w0.3: K5_U_relay_ladder4.4@71.497,51.9 71.499,51.901 71.499,53.998 71.5,54 R8_U_relay_ladder4.2@80.5,54 80.5,53.75 80,53.25 K4_U_relay_ladder4.3@80,51.9
NetK4_U_relay_ladder4_7: K4_U_relay_ladder4.7 K5_U_relay_ladder4.6 R16_U_relay_ladder4.2 R17_U_relay_ladder4.1 | length 13.4
  Bottom Layer w0.3: K5_U_relay_ladder4.6@69.3,45.5 69.3,44.15 68.8,43.65 68.8,43.4 R16_U_relay_ladder4.2@77.8,43.4 R16_U_relay_ladder4.2@77.8,43.4 77.802,45.498 K4_U_relay_ladder4.7@77.803,45.5
NetK4_U_relay_ladder4_8: K4_U_relay_ladder4.8 ULN7.14 | length 51.4
  Top Layer w0.2: ULN7.14@28.3,52.5 v1(29.6,52.5)
  Mid Layer 2 w0.2: v1(29.6,52.5) 30,52.5 30.402,52.098 30.402,49.9 30.697,49.605 71.594,49.605 73.9,47.299 v1(73.9,46.3)
  Bottom Layer w0.2: v1(73.9,46.3) 74.353,46.3 74.603,46.05 K4_U_relay_ladder4.8@74.603,45.5
NetK4_U_relay_ladder5_3: K4_U_relay_ladder5.3 K5_U_relay_ladder5.4 R8_U_relay_ladder5.2 R9_U_relay_ladder5.1 | length 13.4
  Bottom Layer w0.3: K5_U_relay_ladder5.4@71.497,65.1 71.499,65.101 71.499,67.198 71.5,67.2 R8_U_relay_ladder5.2@80.5,67.2 80.5,66.95 80,66.45 K4_U_relay_ladder5.3@80,65.1
NetK4_U_relay_ladder5_7: K4_U_relay_ladder5.7 K5_U_relay_ladder5.6 R16_U_relay_ladder5.2 R17_U_relay_ladder5.1 | length 13.4
  Bottom Layer w0.3: K5_U_relay_ladder5.6@69.3,58.7 69.3,57.35 68.8,56.85 68.8,56.6 R16_U_relay_ladder5.2@77.8,56.6 R16_U_relay_ladder5.2@77.8,56.6 77.802,58.698 K4_U_relay_ladder5.7@77.803,58.7
NetK4_U_relay_ladder5_8: K4_U_relay_ladder5.8 ULN6.14 | length 51.4
  Top Layer w0.2: ULN6.14@28.3,65.7 v1(29.6,65.7)
  Mid Layer 2 w0.2: v1(29.6,65.7) 30,65.7 30.402,65.298 30.402,63.1 30.697,62.805 71.594,62.805 73.9,60.499 v1(73.9,59.5)
  Bottom Layer w0.2: v1(73.9,59.5) 74.353,59.5 74.603,59.25 K4_U_relay_ladder5.8@74.603,58.7
NetK4_U_relay_ladder6_3: K4_U_relay_ladder6.3 K5_U_relay_ladder6.4 R8_U_relay_ladder6.2 R9_U_relay_ladder6.1 | length 13.4
  Top Layer w0.3: K5_U_relay_ladder6.4@71.497,58.7 71.499,58.698 R9_U_relay_ladder6.1@71.5,56.6 R9_U_relay_ladder6.1@71.5,56.6 R8_U_relay_ladder6.2@80.5,56.6 80.5,56.85 80,57.35 K4_U_relay_ladder6.3@80,58.7
NetK4_U_relay_ladder6_7: K4_U_relay_ladder6.7 K5_U_relay_ladder6.6 R16_U_relay_ladder6.2 R17_U_relay_ladder6.1 | length 13.4
  Top Layer w0.3: K5_U_relay_ladder6.6@69.3,65.1 69.3,66.45 68.8,66.95 R17_U_relay_ladder6.1@68.8,67.2 R16_U_relay_ladder6.2@77.8,67.2 77.802,67.198 77.802,65.102 K4_U_relay_ladder6.7@77.803,65.1
NetK4_U_relay_ladder6_8: K4_U_relay_ladder6.8 ULN5.13 | length 50.8
  Top Layer w0.2: ULN5.13@28.3,59.1 v1(29.1,59.1) ; v1(73.9,64.3) 74.353,64.3 74.603,64.55 K4_U_relay_ladder6.8@74.603,65.1
  Mid Layer 1 w0.2: v1(29.1,59.1) 29.807,59.1 30.1,59.393 30.1,62.229 30.866,62.995 72.595,62.995 v1(73.9,64.3)
NetK4_U_relay_ladder7_3: K4_U_relay_ladder7.3 K5_U_relay_ladder7.4 R8_U_relay_ladder7.2 R9_U_relay_ladder7.1 | length 13.4
  Top Layer w0.3: K5_U_relay_ladder7.4@71.497,45.5 71.499,45.498 R9_U_relay_ladder7.1@71.5,43.4 R9_U_relay_ladder7.1@71.5,43.4 R8_U_relay_ladder7.2@80.5,43.4 80.5,43.65 80,44.15 K4_U_relay_ladder7.3@80,45.5
NetK4_U_relay_ladder7_7: K4_U_relay_ladder7.7 K5_U_relay_ladder7.6 R16_U_relay_ladder7.2 R17_U_relay_ladder7.1 | length 13.4
  Top Layer w0.3: K5_U_relay_ladder7.6@69.3,51.9 69.3,53.25 68.8,53.75 R17_U_relay_ladder7.1@68.8,54 R16_U_relay_ladder7.2@77.8,54 77.802,53.998 77.802,51.902 K4_U_relay_ladder7.7@77.803,51.9
NetK4_U_relay_ladder7_8: K4_U_relay_ladder7.8 ULN4.13 | length 50.8
  Top Layer w0.2: ULN4.13@28.3,45.9 v1(29.1,45.9) ; v1(73.9,51.1) 74.353,51.1 74.603,51.35 K4_U_relay_ladder7.8@74.603,51.9
  Mid Layer 1 w0.2: v1(29.1,45.9) 29.807,45.9 30.1,46.193 30.1,49.029 30.866,49.795 72.595,49.795 v1(73.9,51.1)
NetK4_U_relay_ladder8_3: K4_U_relay_ladder8.3 K5_U_relay_ladder8.4 R8_U_relay_ladder8.2 R9_U_relay_ladder8.1 | length 13.4
  Top Layer w0.3: K5_U_relay_ladder8.4@71.497,32.3 71.499,32.298 71.499,30.202 R9_U_relay_ladder8.1@71.5,30.2 R8_U_relay_ladder8.2@80.5,30.2 80.5,30.45 80,30.95 K4_U_relay_ladder8.3@80,32.3
NetK4_U_relay_ladder8_7: K4_U_relay_ladder8.7 K5_U_relay_ladder8.6 R16_U_relay_ladder8.2 R17_U_relay_ladder8.1 | length 13.4
  Top Layer w0.3: K5_U_relay_ladder8.6@69.3,38.7 69.3,40.05 68.8,40.55 R17_U_relay_ladder8.1@68.8,40.8 R16_U_relay_ladder8.2@77.8,40.8 R16_U_relay_ladder8.2@77.8,40.8 77.802,38.702 K4_U_relay_ladder8.7@77.803,38.7
NetK4_U_relay_ladder8_8: K4_U_relay_ladder8.8 ULN3.13 | length 50.8
  Top Layer w0.2: ULN3.13@28.3,32.7 v1(29.1,32.7) ; v1(73.9,37.9) 74.353,37.9 74.603,38.15 K4_U_relay_ladder8.8@74.603,38.7
  Mid Layer 1 w0.2: v1(29.1,32.7) 29.807,32.7 30.1,32.993 30.1,35.829 30.866,36.595 72.595,36.595 v1(73.9,37.9)
NetK4_U_relay_ladder9_3: K4_U_relay_ladder9.3 K5_U_relay_ladder9.4 R8_U_relay_ladder9.2 R9_U_relay_ladder9.1 | length 13.4
  Top Layer w0.3: K5_U_relay_ladder9.4@71.497,19.1 71.499,19.098 71.499,17.002 R9_U_relay_ladder9.1@71.5,17 R8_U_relay_ladder9.2@80.5,17 80.5,17.25 80,17.75 K4_U_relay_ladder9.3@80,19.1
NetK4_U_relay_ladder9_7: K4_U_relay_ladder9.7 K5_U_relay_ladder9.6 R16_U_relay_ladder9.2 R17_U_relay_ladder9.1 | length 13.4
  Top Layer w0.3: K5_U_relay_ladder9.6@69.3,25.5 69.3,26.85 68.8,27.35 R17_U_relay_ladder9.1@68.8,27.6 R16_U_relay_ladder9.2@77.8,27.6 R16_U_relay_ladder9.2@77.8,27.6 77.802,25.502 K4_U_relay_ladder9.7@77.803,25.5
NetK4_U_relay_ladder9_8: K4_U_relay_ladder9.8 ULN2.13 | length 50.8
  Top Layer w0.2: ULN2.13@28.3,19.5 v1(29.1,19.5) ; v1(73.9,24.7) 74.353,24.7 74.603,24.95 K4_U_relay_ladder9.8@74.603,25.5
  Mid Layer 1 w0.2: v1(29.1,19.5) 29.807,19.5 30.1,19.793 30.1,22.629 30.866,23.395 72.595,23.395 v1(73.9,24.7)
NetK4_U_relay_ladder10_3: K4_U_relay_ladder10.3 K5_U_relay_ladder10.4 R8_U_relay_ladder10.2 R9_U_relay_ladder10.1 | length 13.4
  Top Layer w0.3: K5_U_relay_ladder10.4@71.497,5.9 71.499,5.898 71.499,3.802 R9_U_relay_ladder10.1@71.5,3.8 R8_U_relay_ladder10.2@80.5,3.8 80.5,4.05 80,4.55 K4_U_relay_ladder10.3@80,5.9
NetK4_U_relay_ladder10_7: K4_U_relay_ladder10.7 K5_U_relay_ladder10.6 R16_U_relay_ladder10.2 R17_U_relay_ladder10.1 | length 13.4
  Top Layer w0.3: K5_U_relay_ladder10.6@69.3,12.3 69.3,13.65 68.8,14.15 68.8,14.4 77.8,14.4 77.802,14.398 77.802,12.302 K4_U_relay_ladder10.7@77.803,12.3
NetK4_U_relay_ladder10_8: K4_U_relay_ladder10.8 ULN1.13 | length 50.8
  Top Layer w0.2: ULN1.13@28.3,6.3 v1(29.1,6.3) ; v1(73.9,11.5) 74.353,11.5 74.603,11.75 K4_U_relay_ladder10.8@74.603,12.3
  Mid Layer 1 w0.2: v1(29.1,6.3) 29.807,6.3 30.1,6.593 30.1,9.429 30.866,10.195 72.595,10.195 v1(73.9,11.5)
NetK5_U_relay_ladder1_3: K5_U_relay_ladder1.3 K6_U_relay_ladder1.4 R9_U_relay_ladder1.2 R10_U_relay_ladder1.1 | length 13.4
  Bottom Layer w0.3: K6_U_relay_ladder1.4@60.797,12.3 K6_U_relay_ladder1.4@60.797,12.3 60.799,14.398 60.8,14.4 69.8,14.4 69.8,14.15 69.3,13.65 K5_U_relay_ladder1.3@69.3,12.3
NetK5_U_relay_ladder1_7: K5_U_relay_ladder1.7 K6_U_relay_ladder1.6 R17_U_relay_ladder1.2 R18_U_relay_ladder1.1 | length 13.4
  Bottom Layer w0.3: K6_U_relay_ladder1.6@58.6,5.9 58.6,4.55 58.1,4.05 R18_U_relay_ladder1.1@58.1,3.8 R17_U_relay_ladder1.2@67.1,3.8 67.102,3.801 67.102,5.898 K5_U_relay_ladder1.7@67.103,5.9
NetK5_U_relay_ladder1_8: K5_U_relay_ladder1.8 ULN10.13 | length 40.3
  Top Layer w0.2: ULN10.13@28.3,12.4 v1(29.1,12.4)
  Mid Layer 2 w0.2: v1(29.1,12.4) 29.9,12.4 30.1,12.2 30.1,9.98 30.376,9.703 60.894,9.703 63.2,7.397 v1(63.2,6.7)
  Bottom Layer w0.2: v1(63.2,6.7) 63.653,6.7 63.903,6.45 K5_U_relay_ladder1.8@63.903,5.9
NetK5_U_relay_ladder2_3: K5_U_relay_ladder2.3 K6_U_relay_ladder2.4 R9_U_relay_ladder2.2 R10_U_relay_ladder2.1 | length 13.4
  Bottom Layer w0.3: K6_U_relay_ladder2.4@60.797,25.5 K6_U_relay_ladder2.4@60.797,25.5 60.799,27.598 R10_U_relay_ladder2.1@60.8,27.6 R9_U_relay_ladder2.2@69.8,27.6 69.8,27.35 69.3,26.85 K5_U_relay_ladder2.3@69.3,25.5
NetK5_U_relay_ladder2_7: K5_U_relay_ladder2.7 K6_U_relay_ladder2.6 R17_U_relay_ladder2.2 R18_U_relay_ladder2.1 | length 13.4
  Bottom Layer w0.3: K6_U_relay_ladder2.6@58.6,19.1 58.6,17.75 58.1,17.25 R18_U_relay_ladder2.1@58.1,17 R17_U_relay_ladder2.2@67.1,17 67.102,17.001 67.102,19.098 K5_U_relay_ladder2.7@67.103,19.1
NetK5_U_relay_ladder2_8: K5_U_relay_ladder2.8 ULN9.13 | length 40.3
  Top Layer w0.2: ULN9.13@28.3,25.6 v1(29.1,25.6)
  Mid Layer 2 w0.2: v1(29.1,25.6) 29.9,25.6 30.1,25.4 30.1,23.18 30.376,22.903 60.894,22.903 63.2,20.597 v1(63.2,19.9)
  Bottom Layer w0.2: v1(63.2,19.9) 63.653,19.9 63.903,19.65 K5_U_relay_ladder2.8@63.903,19.1
NetK5_U_relay_ladder3_3: K5_U_relay_ladder3.3 K6_U_relay_ladder3.4 R9_U_relay_ladder3.2 R10_U_relay_ladder3.1 | length 13.4
  Bottom Layer w0.3: K6_U_relay_ladder3.4@60.797,38.7 K6_U_relay_ladder3.4@60.797,38.7 60.799,40.798 R10_U_relay_ladder3.1@60.8,40.8 R9_U_relay_ladder3.2@69.8,40.8 69.8,40.55 69.3,40.05 K5_U_relay_ladder3.3@69.3,38.7
NetK5_U_relay_ladder3_7: K5_U_relay_ladder3.7 K6_U_relay_ladder3.6 R17_U_relay_ladder3.2 R18_U_relay_ladder3.1 | length 13.4
  Bottom Layer w0.3: K6_U_relay_ladder3.6@58.6,32.3 58.6,30.95 58.1,30.45 R18_U_relay_ladder3.1@58.1,30.2 R17_U_relay_ladder3.2@67.1,30.2 67.102,30.201 67.102,32.298 K5_U_relay_ladder3.7@67.103,32.3
NetK5_U_relay_ladder3_8: K5_U_relay_ladder3.8 ULN8.13 | length 40.3
  Top Layer w0.2: ULN8.13@28.3,38.8 v1(29.1,38.8)
  Mid Layer 2 w0.2: v1(29.1,38.8) 29.9,38.8 30.1,38.6 30.1,36.38 30.376,36.103 60.894,36.103 63.2,33.797 v1(63.2,33.1)
  Bottom Layer w0.2: v1(63.2,33.1) 63.653,33.1 63.903,32.85 K5_U_relay_ladder3.8@63.903,32.3
NetK5_U_relay_ladder4_3: K5_U_relay_ladder4.3 K6_U_relay_ladder4.4 R9_U_relay_ladder4.2 R10_U_relay_ladder4.1 | length 13.4
  Bottom Layer w0.3: K6_U_relay_ladder4.4@60.797,51.9 60.799,51.902 60.799,53.998 R10_U_relay_ladder4.1@60.8,54 R9_U_relay_ladder4.2@69.8,54 69.8,53.75 69.3,53.25 K5_U_relay_ladder4.3@69.3,51.9
NetK5_U_relay_ladder4_7: K5_U_relay_ladder4.7 K6_U_relay_ladder4.6 R17_U_relay_ladder4.2 R18_U_relay_ladder4.1 | length 13.4
  Bottom Layer w0.3: K6_U_relay_ladder4.6@58.6,45.5 58.6,44.15 58.1,43.65 R18_U_relay_ladder4.1@58.1,43.4 R17_U_relay_ladder4.2@67.1,43.4 67.102,43.401 K5_U_relay_ladder4.7@67.103,45.5 K5_U_relay_ladder4.7@67.103,45.5
NetK5_U_relay_ladder4_8: K5_U_relay_ladder4.8 ULN7.13 | length 40.3
  Top Layer w0.2: ULN7.13@28.3,52 v1(29.1,52)
  Mid Layer 2 w0.2: v1(29.1,52) 29.9,52 30.1,51.8 30.1,49.58 30.376,49.303 60.894,49.303 63.2,46.997 v1(63.2,46.3)
  Bottom Layer w0.2: v1(63.2,46.3) 63.653,46.3 63.903,46.05 K5_U_relay_ladder4.8@63.903,45.5
NetK5_U_relay_ladder5_3: K5_U_relay_ladder5.3 K6_U_relay_ladder5.4 R9_U_relay_ladder5.2 R10_U_relay_ladder5.1 | length 13.4
  Bottom Layer w0.3: K6_U_relay_ladder5.4@60.797,65.1 60.799,65.102 60.799,67.198 R10_U_relay_ladder5.1@60.8,67.2 R9_U_relay_ladder5.2@69.8,67.2 69.8,66.95 69.3,66.45 K5_U_relay_ladder5.3@69.3,65.1
NetK5_U_relay_ladder5_7: K5_U_relay_ladder5.7 K6_U_relay_ladder5.6 R17_U_relay_ladder5.2 R18_U_relay_ladder5.1 | length 13.4
  Bottom Layer w0.3: K6_U_relay_ladder5.6@58.6,58.7 58.6,57.35 58.1,56.85 R18_U_relay_ladder5.1@58.1,56.6 R17_U_relay_ladder5.2@67.1,56.6 67.102,56.601 K5_U_relay_ladder5.7@67.103,58.7 K5_U_relay_ladder5.7@67.103,58.7
NetK5_U_relay_ladder5_8: K5_U_relay_ladder5.8 ULN6.13 | length 40.3
  Top Layer w0.2: ULN6.13@28.3,65.2 v1(29.1,65.2)
  Mid Layer 2 w0.2: v1(29.1,65.2) 29.9,65.2 30.1,65 30.1,62.78 30.376,62.503 60.894,62.503 63.2,60.197 v1(63.2,59.5)
  Bottom Layer w0.2: v1(63.2,59.5) 63.653,59.5 63.903,59.25 K5_U_relay_ladder5.8@63.903,58.7
NetK5_U_relay_ladder6_3: K5_U_relay_ladder6.3 K6_U_relay_ladder6.4 R9_U_relay_ladder6.2 R10_U_relay_ladder6.1 | length 13.4
  Top Layer w0.3: K6_U_relay_ladder6.4@60.797,58.7 K6_U_relay_ladder6.4@60.797,58.7 60.799,56.601 R10_U_relay_ladder6.1@60.8,56.6 R9_U_relay_ladder6.2@69.8,56.6 69.8,56.85 69.3,57.35 K5_U_relay_ladder6.3@69.3,58.7
NetK5_U_relay_ladder6_7: K5_U_relay_ladder6.7 K6_U_relay_ladder6.6 R17_U_relay_ladder6.2 R18_U_relay_ladder6.1 | length 13.4
  Top Layer w0.3: K6_U_relay_ladder6.6@58.6,65.1 58.6,66.45 58.1,66.95 R18_U_relay_ladder6.1@58.1,67.2 R17_U_relay_ladder6.2@67.1,67.2 67.102,67.198 67.102,65.102 K5_U_relay_ladder6.7@67.103,65.1
NetK5_U_relay_ladder6_8: K5_U_relay_ladder6.8 ULN5.14 | length 39.7
  Top Layer w0.2: ULN5.14@28.3,59.6 v1(29.6,59.6) ; v1(63.2,64.3) 63.653,64.3 63.903,64.55 K5_U_relay_ladder6.8@63.903,65.1
  Mid Layer 1 w0.2: v1(29.6,59.6) 29.6,59.644 29.798,59.842 29.798,62.354 30.741,63.297 62.197,63.297 v1(63.2,64.3)
NetK5_U_relay_ladder7_3: K5_U_relay_ladder7.3 K6_U_relay_ladder7.4 R9_U_relay_ladder7.2 R10_U_relay_ladder7.1 | length 13.4
  Top Layer w0.3: K6_U_relay_ladder7.4@60.797,45.5 K6_U_relay_ladder7.4@60.797,45.5 60.799,43.401 R10_U_relay_ladder7.1@60.8,43.4 R9_U_relay_ladder7.2@69.8,43.4 69.8,43.65 69.3,44.15 K5_U_relay_ladder7.3@69.3,45.5
NetK5_U_relay_ladder7_7: K5_U_relay_ladder7.7 K6_U_relay_ladder7.6 R17_U_relay_ladder7.2 R18_U_relay_ladder7.1 | length 13.4
  Top Layer w0.3: K6_U_relay_ladder7.6@58.6,51.9 58.6,53.25 58.1,53.75 R18_U_relay_ladder7.1@58.1,54 R17_U_relay_ladder7.2@67.1,54 67.102,53.998 67.102,51.902 K5_U_relay_ladder7.7@67.103,51.9
NetK5_U_relay_ladder7_8: K5_U_relay_ladder7.8 ULN4.14 | length 39.7
  Top Layer w0.2: ULN4.14@28.3,46.4 v1(29.6,46.4) ; v1(63.2,51.1) 63.653,51.1 63.903,51.35 K5_U_relay_ladder7.8@63.903,51.9
  Mid Layer 1 w0.2: v1(29.6,46.4) 29.6,46.444 29.798,46.642 29.798,49.154 30.741,50.097 62.197,50.097 v1(63.2,51.1)
NetK5_U_relay_ladder8_3: K5_U_relay_ladder8.3 K6_U_relay_ladder8.4 R9_U_relay_ladder8.2 R10_U_relay_ladder8.1 | length 13.4
  Top Layer w0.3: K6_U_relay_ladder8.4@60.797,32.3 60.799,32.298 60.799,30.201 R10_U_relay_ladder8.1@60.8,30.2 R9_U_relay_ladder8.2@69.8,30.2 69.8,30.45 69.3,30.95 K5_U_relay_ladder8.3@69.3,32.3
NetK5_U_relay_ladder8_7: K5_U_relay_ladder8.7 K6_U_relay_ladder8.6 R17_U_relay_ladder8.2 R18_U_relay_ladder8.1 | length 13.4
  Top Layer w0.3: K6_U_relay_ladder8.6@58.6,38.7 58.6,40.05 58.1,40.55 R18_U_relay_ladder8.1@58.1,40.8 R17_U_relay_ladder8.2@67.1,40.8 67.102,40.798 K5_U_relay_ladder8.7@67.103,38.7 K5_U_relay_ladder8.7@67.103,38.7
NetK5_U_relay_ladder8_8: K5_U_relay_ladder8.8 ULN3.14 | length 39.7
  Top Layer w0.2: ULN3.14@28.3,33.2 v1(29.6,33.2) ; v1(63.2,37.9) 63.653,37.9 63.903,38.15 K5_U_relay_ladder8.8@63.903,38.7
  Mid Layer 1 w0.2: v1(29.6,33.2) 29.6,33.244 29.798,33.442 29.798,35.954 30.741,36.897 62.197,36.897 v1(63.2,37.9)
NetK5_U_relay_ladder9_3: K5_U_relay_ladder9.3 K6_U_relay_ladder9.4 R9_U_relay_ladder9.2 R10_U_relay_ladder9.1 | length 13.4
  Top Layer w0.3: K6_U_relay_ladder9.4@60.797,19.1 60.799,19.098 60.799,17.001 R10_U_relay_ladder9.1@60.8,17 R9_U_relay_ladder9.2@69.8,17 69.8,17.25 69.3,17.75 K5_U_relay_ladder9.3@69.3,19.1
NetK5_U_relay_ladder9_7: K5_U_relay_ladder9.7 K6_U_relay_ladder9.6 R17_U_relay_ladder9.2 R18_U_relay_ladder9.1 | length 13.4
  Top Layer w0.3: K6_U_relay_ladder9.6@58.6,25.5 58.6,26.85 58.1,27.35 R18_U_relay_ladder9.1@58.1,27.6 R17_U_relay_ladder9.2@67.1,27.6 67.102,27.598 K5_U_relay_ladder9.7@67.103,25.5 K5_U_relay_ladder9.7@67.103,25.5
NetK5_U_relay_ladder9_8: K5_U_relay_ladder9.8 ULN2.14 | length 39.7
  Top Layer w0.2: ULN2.14@28.3,20 v1(29.6,20) ; v1(63.2,24.7) 63.653,24.7 63.903,24.95 K5_U_relay_ladder9.8@63.903,25.5
  Mid Layer 1 w0.2: v1(29.6,20) 29.6,20.044 29.798,20.242 29.798,22.754 30.741,23.697 62.197,23.697 v1(63.2,24.7)
NetK5_U_relay_ladder10_3: K5_U_relay_ladder10.3 K6_U_relay_ladder10.4 R9_U_relay_ladder10.2 R10_U_relay_ladder10.1 | length 13.4
  Top Layer w0.3: K6_U_relay_ladder10.4@60.797,5.9 60.799,5.898 60.799,3.801 R10_U_relay_ladder10.1@60.8,3.8 R9_U_relay_ladder10.2@69.8,3.8 69.8,4.05 69.3,4.55 K5_U_relay_ladder10.3@69.3,5.9
NetK5_U_relay_ladder10_7: K5_U_relay_ladder10.7 K6_U_relay_ladder10.6 R17_U_relay_ladder10.2 R18_U_relay_ladder10.1 | length 13.4
  Top Layer w0.3: K6_U_relay_ladder10.6@58.6,12.3 58.6,13.65 58.1,14.15 58.1,14.4 67.1,14.4 67.102,14.398 K5_U_relay_ladder10.7@67.103,12.3 K5_U_relay_ladder10.7@67.103,12.3
NetK5_U_relay_ladder10_8: K5_U_relay_ladder10.8 ULN1.14 | length 39.7
  Top Layer w0.2: ULN1.14@28.3,6.8 v1(29.6,6.8) ; v1(63.2,11.5) 63.653,11.5 63.903,11.75 K5_U_relay_ladder10.8@63.903,12.3
  Mid Layer 1 w0.2: v1(29.6,6.8) 29.6,6.844 29.798,7.042 29.798,9.554 30.741,10.497 62.197,10.497 v1(63.2,11.5)
NetK6_U_relay_ladder1_3: K6_U_relay_ladder1.3 K7_U_relay_ladder1.4 R10_U_relay_ladder1.2 R11_U_relay_ladder1.1 | length 13.4
  Bottom Layer w0.3: K7_U_relay_ladder1.4@50.097,12.3 50.099,12.301 50.099,14.398 50.1,14.4 59.1,14.4 59.1,14.15 58.6,13.65 K6_U_relay_ladder1.3@58.6,12.3
NetK6_U_relay_ladder1_7: K6_U_relay_ladder1.7 K7_U_relay_ladder1.6 R18_U_relay_ladder1.2 R19_U_relay_ladder1.1 | length 13.4
  Bottom Layer w0.3: K7_U_relay_ladder1.6@47.9,5.9 47.9,4.55 47.4,4.05 R19_U_relay_ladder1.1@47.4,3.8 56.4,3.8 56.402,3.801 56.402,5.898 K6_U_relay_ladder1.7@56.403,5.9
NetK6_U_relay_ladder1_8: K6_U_relay_ladder1.8 ULN10.12 | length 29.8
  Top Layer w0.2: ULN10.12@28.3,11.9 v1(29.6,11.9)
  Mid Layer 2 w0.2: v1(29.6,11.9) 29.6,10.053 30.251,9.402 51.494,9.402 52.5,8.396 v1(52.5,6.7)
  Bottom Layer w0.2: v1(52.5,6.7) 52.953,6.7 53.203,6.45 K6_U_relay_ladder1.8@53.203,5.9
NetK6_U_relay_ladder2_3: K6_U_relay_ladder2.3 K7_U_relay_ladder2.4 R10_U_relay_ladder2.2 R11_U_relay_ladder2.1 | length 13.4
  Bottom Layer w0.3: K7_U_relay_ladder2.4@50.097,25.5 50.099,25.501 R11_U_relay_ladder2.1@50.1,27.6 R11_U_relay_ladder2.1@50.1,27.6 59.1,27.6 59.1,27.35 58.6,26.85 K6_U_relay_ladder2.3@58.6,25.5